# Altium PCB Board4layer.PcbDoc (part 2 of 2)
Units mm, origin at the board's own origin, x right, y up, seen from the top; angles counter-clockwise.
Board outline 136 x 96 mm, 4 copper layers (Top Layer, Int1 (GND), Int2 (PWR), Bottom Layer), stack 1.369 mm thick; 242 components, 241 nets, 1041 pads, 277 vias.
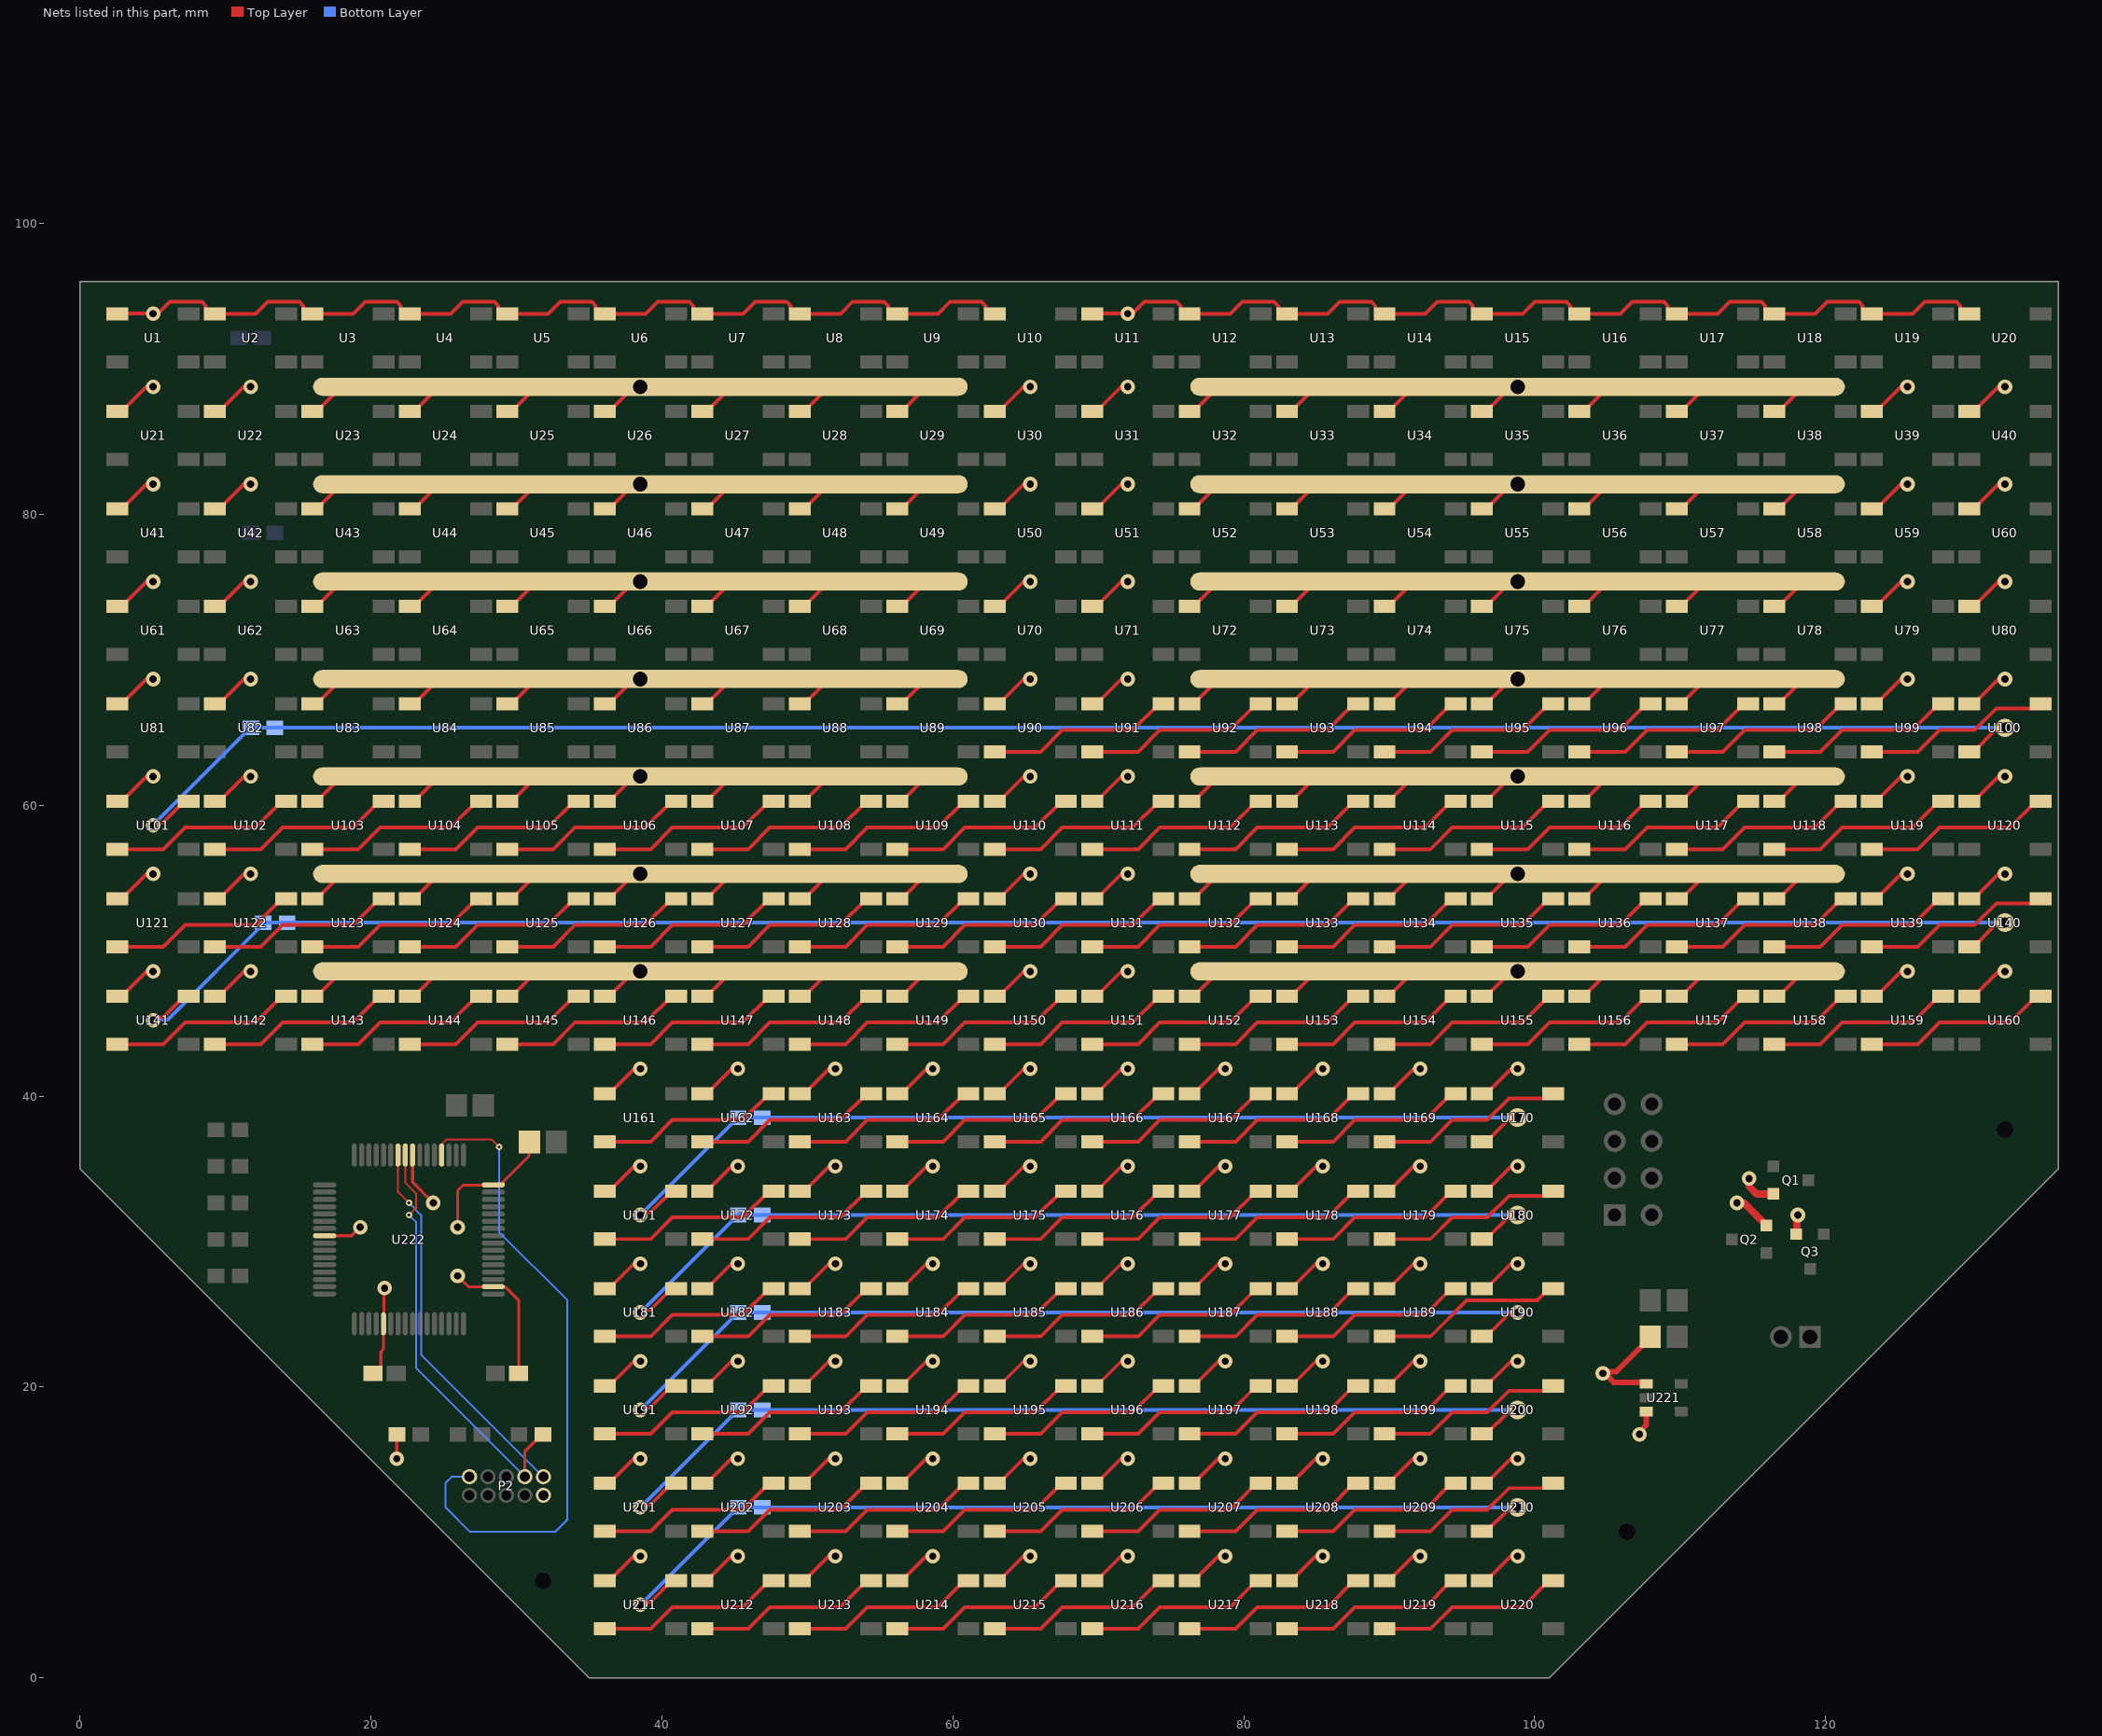
[diagram p4: the nets of this part, all layers, seen from the top]

## Via types
v1: diameter 1, hole 0.5, Top Layer to Bottom Layer, tented both sides, 221 vias
v2: diameter 1, hole 0.5, Top Layer to Bottom Layer, 33 vias
v3: diameter 1.27, hole 0.711, Top Layer to Bottom Layer, 8 vias
v4: diameter 0.45, hole 0.2, Top Layer to Bottom Layer, 7 vias
v5: diameter 1, hole 0.5, Top Layer to Bottom Layer, tented top, 5 vias
v6: diameter 0.45, hole 0.2, Top Layer to Bottom Layer, tented top, 3 vias

## Nets (pads, with @x,y where several pads share a name; then routed paths per layer and width w, separated by ;. In a path a pad name is that pad's centre, name@x,y a point inside that pad or via, vN(x,y) a via of type N, cw(c..) or ccw(c..) an arc to the next point about the centre after c; other vN are vias at no path point) (continued)
NetU90_2: U90.2 U91.4 | length 13
  Top Layer w0.254: U90.2@62.875,63.675 66.036,63.675 67.525,65.163 72.363,65.163 74.175,66.975 U91.4@74.475,66.975
NetU91_2: U91.2 U92.4 | length 13
  Top Layer w0.254: U91.2@69.575,63.675 72.736,63.675 74.225,65.163 79.064,65.163 80.875,66.975 U92.4@81.175,66.975
NetU92_2: U92.2 U93.4 | length 13
  Top Layer w0.254: U92.2@76.275,63.675 79.436,63.675 80.925,65.163 85.764,65.163 87.575,66.975 U93.4@87.875,66.975
NetU93_2: U93.2 U94.4 | length 13
  Top Layer w0.254: U93.2@82.975,63.675 86.136,63.675 87.625,65.163 92.464,65.163 94.275,66.975 U94.4@94.575,66.975
NetU94_2: U94.2 U95.4 | length 13
  Top Layer w0.254: U94.2@89.675,63.675 92.836,63.675 94.325,65.163 99.164,65.163 100.975,66.975 U95.4@101.275,66.975
NetU95_2: U95.2 U96.4 | length 13
  Top Layer w0.254: U95.2@96.375,63.675 99.536,63.675 101.025,65.163 105.863,65.163 107.675,66.975 U96.4@107.975,66.975
NetU96_2: U96.2 U97.4 | length 13
  Top Layer w0.254: U96.2@103.075,63.675 106.236,63.675 107.725,65.163 112.564,65.163 114.375,66.975 U97.4@114.675,66.975
NetU97_2: U97.2 U98.4 | length 13
  Top Layer w0.254: U97.2@109.775,63.675 112.936,63.675 114.425,65.163 119.264,65.163 121.075,66.975 U98.4@121.375,66.975
NetU98_2: U98.2 U99.4 | length 13
  Top Layer w0.254: U98.2@116.475,63.675 119.636,63.675 121.125,65.163 125.964,65.163 127.775,66.975 U99.4@128.075,66.975
NetU99_2: U99.2 U100.4 | length 13
  Top Layer w0.254: U99.2@123.175,63.675 126.336,63.675 127.825,65.163 130.244,65.163 131.733,66.652 134.452,66.652 U100.4@134.775,66.975
NetU100_2: pad.*@11.75,65.325 pad.*@13.4,65.325 U100.2 U101.4 | length 136.3
  Top Layer w0.254: v2(5.025,58.625) 5.219,58.819 5.719,58.819 7.175,60.275 U101.4@7.475,60.275 ; U100.2@129.875,63.675 130.175,63.675 131.631,65.131 132.131,65.131 v3(132.325,65.325)
  Bottom Layer w0.254: v2(5.025,58.625) 11.725,65.325 v3(132.325,65.325)
NetU101_2: U101.2 U102.4 | length 13
  Top Layer w0.254: U101.2@2.575,56.975 5.736,56.975 7.225,58.464 12.064,58.464 13.875,60.275 U102.4@14.175,60.275
NetU102_2: U102.2 U103.4 | length 13
  Top Layer w0.254: U102.2@9.275,56.975 12.436,56.975 13.925,58.464 18.763,58.464 20.575,60.275 U103.4@20.875,60.275
NetU103_2: U103.2 U104.4 | length 13
  Top Layer w0.254: U103.2@15.975,56.975 19.136,56.975 20.625,58.464 25.464,58.464 27.275,60.275 U104.4@27.575,60.275
NetU104_2: U104.2 U105.4 | length 13
  Top Layer w0.254: U104.2@22.675,56.975 25.836,56.975 27.325,58.464 32.164,58.464 33.975,60.275 U105.4@34.275,60.275
NetU105_2: U105.2 U106.4 | length 13
  Top Layer w0.254: U105.2@29.375,56.975 32.536,56.975 34.025,58.464 38.864,58.464 40.675,60.275 U106.4@40.975,60.275
NetU106_2: U106.2 U107.4 | length 13
  Top Layer w0.254: U106.2@36.075,56.975 39.236,56.975 40.725,58.464 45.564,58.464 47.375,60.275 U107.4@47.675,60.275
NetU107_2: U107.2 U108.4 | length 13
  Top Layer w0.254: U107.2@42.775,56.975 45.936,56.975 47.425,58.464 52.264,58.464 54.075,60.275 U108.4@54.375,60.275
NetU108_2: U108.2 U109.4 | length 13
  Top Layer w0.254: U108.2@49.475,56.975 52.636,56.975 54.125,58.464 58.964,58.464 60.775,60.275 U109.4@61.075,60.275
NetU109_2: U109.2 U110.4 | length 13
  Top Layer w0.254: U109.2@56.175,56.975 59.336,56.975 60.825,58.464 65.664,58.464 67.475,60.275 U110.4@67.775,60.275
NetU110_2: U110.2 U111.4 | length 13
  Top Layer w0.254: U110.2@62.875,56.975 66.036,56.975 67.525,58.464 72.363,58.464 74.175,60.275 U111.4@74.475,60.275
NetU111_2: U111.2 U112.4 | length 13
  Top Layer w0.254: U111.2@69.575,56.975 72.736,56.975 74.225,58.464 79.064,58.464 80.875,60.275 U112.4@81.175,60.275
NetU112_2: U112.2 U113.4 | length 13
  Top Layer w0.254: U112.2@76.275,56.975 79.436,56.975 80.925,58.464 85.764,58.464 87.575,60.275 U113.4@87.875,60.275
NetU113_2: U113.2 U114.4 | length 13
  Top Layer w0.254: U113.2@82.975,56.975 86.136,56.975 87.625,58.464 92.464,58.464 94.275,60.275 U114.4@94.575,60.275
NetU114_2: U114.2 U115.4 | length 13
  Top Layer w0.254: U114.2@89.675,56.975 92.836,56.975 94.325,58.464 99.164,58.464 100.975,60.275 U115.4@101.275,60.275
NetU115_2: U115.2 U116.4 | length 13
  Top Layer w0.254: U115.2@96.375,56.975 99.536,56.975 101.025,58.464 105.863,58.464 107.675,60.275 U116.4@107.975,60.275
NetU116_2: U116.2 U117.4 | length 13
  Top Layer w0.254: U116.2@103.075,56.975 106.236,56.975 107.725,58.464 112.564,58.464 114.375,60.275 U117.4@114.675,60.275
NetU117_2: U117.2 U118.4 | length 13
  Top Layer w0.254: U117.2@109.775,56.975 112.936,56.975 114.425,58.464 119.264,58.464 121.075,60.275 U118.4@121.375,60.275
NetU118_2: U118.2 U119.4 | length 13
  Top Layer w0.254: U118.2@116.475,56.975 119.636,56.975 121.125,58.464 125.964,58.464 127.775,60.275 U119.4@128.075,60.275
NetU119_2: U119.2 U120.4 | length 13
  Top Layer w0.254: U119.2@123.175,56.975 126.336,56.975 127.825,58.464 132.664,58.464 134.475,60.275 U120.4@134.775,60.275
NetU121_2: U121.2 U122.4 | length 13
  Top Layer w0.254: U121.2@2.575,50.275 5.736,50.275 7.225,51.763 12.064,51.763 13.875,53.575 U122.4@14.175,53.575
NetU122_2: U122.2 U123.4 | length 13
  Top Layer w0.254: U122.2@9.275,50.275 12.436,50.275 13.925,51.763 18.763,51.763 20.575,53.575 U123.4@20.875,53.575
NetU123_2: U123.2 U124.4 | length 13
  Top Layer w0.254: U123.2@15.975,50.275 19.136,50.275 20.625,51.763 25.464,51.763 27.275,53.575 U124.4@27.575,53.575
NetU124_2: U124.2 U125.4 | length 13
  Top Layer w0.254: U124.2@22.675,50.275 25.836,50.275 27.325,51.763 32.164,51.763 33.975,53.575 U125.4@34.275,53.575
NetU125_2: U125.2 U126.4 | length 13
  Top Layer w0.254: U125.2@29.375,50.275 32.536,50.275 34.025,51.763 38.864,51.763 40.675,53.575 U126.4@40.975,53.575
NetU126_2: U126.2 U127.4 | length 13
  Top Layer w0.254: U126.2@36.075,50.275 39.236,50.275 40.725,51.763 45.564,51.763 47.375,53.575 U127.4@47.675,53.575
NetU127_2: U127.2 U128.4 | length 13
  Top Layer w0.254: U127.2@42.775,50.275 45.936,50.275 47.425,51.763 52.264,51.763 54.075,53.575 U128.4@54.375,53.575
NetU128_2: U128.2 U129.4 | length 13
  Top Layer w0.254: U128.2@49.475,50.275 52.636,50.275 54.125,51.763 58.964,51.763 60.775,53.575 U129.4@61.075,53.575
NetU129_2: U129.2 U130.4 | length 13
  Top Layer w0.254: U129.2@56.175,50.275 59.336,50.275 60.825,51.763 65.664,51.763 67.475,53.575 U130.4@67.775,53.575
NetU130_2: U130.2 U131.4 | length 13
  Top Layer w0.254: U130.2@62.875,50.275 66.036,50.275 67.525,51.763 72.363,51.763 74.175,53.575 U131.4@74.475,53.575
NetU131_2: U131.2 U132.4 | length 13
  Top Layer w0.254: U131.2@69.575,50.275 72.736,50.275 74.225,51.763 79.064,51.763 80.875,53.575 U132.4@81.175,53.575
NetU132_2: U132.2 U133.4 | length 13
  Top Layer w0.254: U132.2@76.275,50.275 79.436,50.275 80.925,51.763 85.764,51.763 87.575,53.575 U133.4@87.875,53.575
NetU133_2: U133.2 U134.4 | length 13
  Top Layer w0.254: U133.2@82.975,50.275 86.136,50.275 87.625,51.763 92.464,51.763 94.275,53.575 U134.4@94.575,53.575
NetU134_2: U134.2 U135.4 | length 13
  Top Layer w0.254: U134.2@89.675,50.275 92.836,50.275 94.325,51.763 99.164,51.763 100.975,53.575 U135.4@101.275,53.575
NetU135_2: U135.2 U136.4 | length 13
  Top Layer w0.254: U135.2@96.375,50.275 99.536,50.275 101.025,51.763 105.863,51.763 107.675,53.575 U136.4@107.975,53.575
NetU136_2: U136.2 U137.4 | length 13
  Top Layer w0.254: U136.2@103.075,50.275 106.236,50.275 107.725,51.763 112.564,51.763 114.375,53.575 U137.4@114.675,53.575
NetU137_2: U137.2 U138.4 | length 13
  Top Layer w0.254: U137.2@109.775,50.275 112.936,50.275 114.425,51.763 119.264,51.763 121.075,53.575 U138.4@121.375,53.575
NetU138_2: U138.2 U139.4 | length 13
  Top Layer w0.254: U138.2@116.475,50.275 119.636,50.275 121.125,51.763 125.964,51.763 127.775,53.575 U139.4@128.075,53.575
NetU139_2: U139.2 U140.4 | length 13
  Top Layer w0.254: U139.2@123.175,50.275 126.336,50.275 127.825,51.763 130.244,51.763 131.733,53.252 134.452,53.252 U140.4@134.775,53.575
NetU140_2: pad.*@12.588,51.925 pad.*@14.238,51.925 U140.2 U141.4 | length 136.3
  Top Layer w0.254: v2(5.025,45.225) 5.219,45.419 5.719,45.419 7.175,46.875 U141.4@7.475,46.875 ; U140.2@129.875,50.275 130.175,50.275 131.631,51.731 132.131,51.731 v3(132.325,51.925)
  Bottom Layer w0.254: v2(5.025,45.225) 5.066,45.266 6.041,45.266 12.7,51.925 v3(132.325,51.925)
NetU141_2: U141.2 U142.4 | length 13
  Top Layer w0.254: U141.2@2.575,43.575 5.736,43.575 7.225,45.063 12.064,45.063 13.875,46.875 U142.4@14.175,46.875
NetU142_2: U142.2 U143.4 | length 13
  Top Layer w0.254: U142.2@9.275,43.575 12.436,43.575 13.925,45.063 18.763,45.063 20.575,46.875 U143.4@20.875,46.875
NetU143_2: U143.2 U144.4 | length 13
  Top Layer w0.254: U143.2@15.975,43.575 19.136,43.575 20.625,45.063 25.464,45.063 27.275,46.875 U144.4@27.575,46.875
NetU144_2: U144.2 U145.4 | length 13
  Top Layer w0.254: U144.2@22.675,43.575 25.836,43.575 27.325,45.063 32.164,45.063 33.975,46.875 U145.4@34.275,46.875
NetU145_2: U145.2 U146.4 | length 13
  Top Layer w0.254: U145.2@29.375,43.575 32.536,43.575 34.025,45.063 38.864,45.063 40.675,46.875 U146.4@40.975,46.875
NetU146_2: U146.2 U147.4 | length 13
  Top Layer w0.254: U146.2@36.075,43.575 39.236,43.575 40.725,45.063 45.564,45.063 47.375,46.875 U147.4@47.675,46.875
NetU147_2: U147.2 U148.4 | length 13
  Top Layer w0.254: U147.2@42.775,43.575 45.936,43.575 47.425,45.063 52.264,45.063 54.075,46.875 U148.4@54.375,46.875
NetU148_2: U148.2 U149.4 | length 13
  Top Layer w0.254: U148.2@49.475,43.575 52.636,43.575 54.125,45.063 58.964,45.063 60.775,46.875 U149.4@61.075,46.875
NetU149_2: U149.2 U150.4 | length 13
  Top Layer w0.254: U149.2@56.175,43.575 59.336,43.575 60.825,45.063 65.664,45.063 67.475,46.875 U150.4@67.775,46.875
NetU150_2: U150.2 U151.4 | length 13
  Top Layer w0.254: U150.2@62.875,43.575 66.036,43.575 67.525,45.063 72.363,45.063 74.175,46.875 U151.4@74.475,46.875
NetU151_2: U151.2 U152.4 | length 13
  Top Layer w0.254: U151.2@69.575,43.575 72.736,43.575 74.225,45.063 79.064,45.063 80.875,46.875 U152.4@81.175,46.875
NetU152_2: U152.2 U153.4 | length 13
  Top Layer w0.254: U152.2@76.275,43.575 79.436,43.575 80.925,45.063 85.764,45.063 87.575,46.875 U153.4@87.875,46.875
NetU153_2: U153.2 U154.4 | length 13
  Top Layer w0.254: U153.2@82.975,43.575 86.136,43.575 87.625,45.063 92.464,45.063 94.275,46.875 U154.4@94.575,46.875
NetU154_2: U154.2 U155.4 | length 13
  Top Layer w0.254: U154.2@89.675,43.575 92.836,43.575 94.325,45.063 99.164,45.063 100.975,46.875 U155.4@101.275,46.875
NetU155_2: U155.2 U156.4 | length 13
  Top Layer w0.254: U155.2@96.375,43.575 99.536,43.575 101.025,45.063 105.863,45.063 107.675,46.875 U156.4@107.975,46.875
NetU156_2: U156.2 U157.4 | length 13
  Top Layer w0.254: U156.2@103.075,43.575 106.236,43.575 107.725,45.063 112.564,45.063 114.375,46.875 U157.4@114.675,46.875
NetU157_2: U157.2 U158.4 | length 13
  Top Layer w0.254: U157.2@109.775,43.575 112.936,43.575 114.425,45.063 119.264,45.063 121.075,46.875 U158.4@121.375,46.875
NetU158_2: U158.2 U159.4 | length 13
  Top Layer w0.254: U158.2@116.475,43.575 119.636,43.575 121.125,45.063 125.964,45.063 127.775,46.875 U159.4@128.075,46.875
NetU159_2: U159.2 U160.4 | length 13
  Top Layer w0.254: U159.2@123.175,43.575 126.336,43.575 127.825,45.063 132.664,45.063 134.475,46.875 U160.4@134.775,46.875
NetU161_2: U161.2 U162.4 | length 13
  Top Layer w0.254: U161.2@36.075,36.875 39.236,36.875 40.725,38.363 45.564,38.363 47.375,40.175 U162.4@47.675,40.175
NetU162_2: U162.2 U163.4 | length 13
  Top Layer w0.254: U162.2@42.775,36.875 45.936,36.875 47.425,38.363 52.263,38.363 54.075,40.175 U163.4@54.375,40.175
NetU163_2: U163.2 U164.4 | length 13
  Top Layer w0.254: U163.2@49.475,36.875 52.636,36.875 54.125,38.363 58.963,38.363 60.775,40.175 U164.4@61.075,40.175
NetU164_2: U164.2 U165.4 | length 13
  Top Layer w0.254: U164.2@56.175,36.875 59.336,36.875 60.825,38.363 65.664,38.363 67.475,40.175 U165.4@67.775,40.175
NetU165_2: U165.2 U166.4 | length 13
  Top Layer w0.254: U165.2@62.875,36.875 66.036,36.875 67.525,38.363 72.364,38.363 74.175,40.175 U166.4@74.475,40.175
NetU166_2: U166.2 U167.4 | length 13
  Top Layer w0.254: U166.2@69.575,36.875 72.736,36.875 74.225,38.363 79.064,38.363 80.875,40.175 U167.4@81.175,40.175
NetU167_2: U167.2 U168.4 | length 13
  Top Layer w0.254: U167.2@76.275,36.875 79.436,36.875 80.925,38.363 85.763,38.363 87.575,40.175 U168.4@87.875,40.175
NetU168_2: U168.2 U169.4 | length 13
  Top Layer w0.254: U168.2@82.975,36.875 86.136,36.875 87.625,38.363 92.463,38.363 94.275,40.175 U169.4@94.575,40.175
NetU169_2: U169.2 U170.4 | length 13
  Top Layer w0.254: U169.2@89.675,36.875 92.836,36.875 94.325,38.363 96.744,38.363 98.233,39.852 100.952,39.852 U170.4@101.275,40.175
NetU170_2: pad.*@45.25,38.525 pad.*@46.9,38.525 U170.2 U171.4 | length 69.3
  Top Layer w0.254: v2(38.525,31.825) 38.719,32.019 39.219,32.019 40.675,33.475 U171.4@40.975,33.475 ; U170.2@96.375,36.875 96.675,36.875 98.131,38.331 98.631,38.331 v3(98.825,38.525)
  Bottom Layer w0.254: v2(38.525,31.825) 45.225,38.525 v3(98.825,38.525)
NetU171_2: U171.2 U172.4 | length 13
  Top Layer w0.254: U171.2@36.075,30.175 39.236,30.175 40.725,31.664 45.564,31.664 47.375,33.475 U172.4@47.675,33.475
NetU172_2: U172.2 U173.4 | length 13
  Top Layer w0.254: U172.2@42.775,30.175 45.936,30.175 47.425,31.664 52.264,31.664 54.075,33.475 U173.4@54.375,33.475
NetU173_2: U173.2 U174.4 | length 13
  Top Layer w0.254: U173.2@49.475,30.175 52.636,30.175 54.125,31.664 58.964,31.664 60.775,33.475 U174.4@61.075,33.475
NetU174_2: U174.2 U175.4 | length 13
  Top Layer w0.254: U174.2@56.175,30.175 59.336,30.175 60.825,31.664 65.664,31.664 67.475,33.475 U175.4@67.775,33.475
NetU175_2: U175.2 U176.4 | length 13
  Top Layer w0.254: U175.2@62.875,30.175 66.036,30.175 67.525,31.664 72.364,31.664 74.175,33.475 U176.4@74.475,33.475
NetU176_2: U176.2 U177.4 | length 13
  Top Layer w0.254: U176.2@69.575,30.175 72.736,30.175 74.225,31.664 79.064,31.664 80.875,33.475 U177.4@81.175,33.475
NetU177_2: U177.2 U178.4 | length 13
  Top Layer w0.254: U177.2@76.275,30.175 79.436,30.175 80.925,31.664 85.764,31.664 87.575,33.475 U178.4@87.875,33.475
NetU178_2: U178.2 U179.4 | length 13
  Top Layer w0.254: U178.2@82.975,30.175 86.136,30.175 87.625,31.664 92.464,31.664 94.275,33.475 U179.4@94.575,33.475
NetU179_2: U179.2 U180.4 | length 13
  Top Layer w0.254: U179.2@89.675,30.175 92.836,30.175 94.325,31.664 96.744,31.664 98.233,33.152 100.952,33.152 U180.4@101.275,33.475
NetU180_2: pad.*@45.25,31.825 pad.*@46.9,31.825 U180.2 U181.4 | length 69.3
  Top Layer w0.254: v2(38.525,25.125) 38.719,25.319 39.219,25.319 40.675,26.775 U181.4@40.975,26.775 ; U180.2@96.375,30.175 96.675,30.175 98.131,31.631 98.631,31.631 v3(98.825,31.825)
  Bottom Layer w0.254: v2(38.525,25.125) 45.225,31.825 v3(98.825,31.825)
NetU181_2: U181.2 U182.4 | length 13
  Top Layer w0.254: U181.2@36.075,23.475 39.236,23.475 40.725,24.963 45.564,24.963 47.375,26.775 U182.4@47.675,26.775
NetU182_2: U182.2 U183.4 | length 13
  Top Layer w0.254: U182.2@42.775,23.475 45.936,23.475 47.425,24.963 52.263,24.963 54.075,26.775 U183.4@54.375,26.775
NetU183_2: U183.2 U184.4 | length 13
  Top Layer w0.254: U183.2@49.475,23.475 52.636,23.475 54.125,24.963 58.963,24.963 60.775,26.775 U184.4@61.075,26.775
NetU184_2: U184.2 U185.4 | length 13
  Top Layer w0.254: U184.2@56.175,23.475 59.336,23.475 60.825,24.963 65.664,24.963 67.475,26.775 U185.4@67.775,26.775
NetU185_2: U185.2 U186.4 | length 13
  Top Layer w0.254: U185.2@62.875,23.475 66.036,23.475 67.525,24.963 72.364,24.963 74.175,26.775 U186.4@74.475,26.775
NetU186_2: U186.2 U187.4 | length 13
  Top Layer w0.254: U186.2@69.575,23.475 72.736,23.475 74.225,24.963 79.064,24.963 80.875,26.775 U187.4@81.175,26.775
NetU187_2: U187.2 U188.4 | length 13
  Top Layer w0.254: U187.2@76.275,23.475 79.436,23.475 80.925,24.963 85.763,24.963 87.575,26.775 U188.4@87.875,26.775
NetU188_2: U188.2 U189.4 | length 13
  Top Layer w0.254: U188.2@82.975,23.475 86.136,23.475 87.625,24.963 92.463,24.963 94.275,26.775 U189.4@94.575,26.775
NetU189_2: U189.2 U190.4 | length 13
  Top Layer w0.254: U189.2@89.675,23.475 92.836,23.475 95.316,25.955 100.155,25.955 100.975,26.775 U190.4@101.275,26.775
NetU190_2: pad.*@45.25,25.125 pad.*@46.9,25.125 U190.2 U191.4 | length 69.3
  Top Layer w0.254: v2(38.525,18.425) 38.668,18.568 39.168,18.568 40.675,20.075 U191.4@40.975,20.075 ; U190.2@96.375,23.475 96.675,23.475 98.182,24.982 98.682,24.982 v2(98.825,25.125)
  Bottom Layer w0.254: v2(38.525,18.425) 45.225,25.125 v2(98.825,25.125)
NetU191_2: U191.2 U192.4 | length 13
  Top Layer w0.254: U191.2@36.075,16.775 39.236,16.775 40.725,18.263 45.564,18.263 47.375,20.075 U192.4@47.675,20.075
NetU192_2: U192.2 U193.4 | length 13
  Top Layer w0.254: U192.2@42.775,16.775 45.936,16.775 47.425,18.263 52.263,18.263 54.075,20.075 U193.4@54.375,20.075
NetU193_2: U193.2 U194.4 | length 13
  Top Layer w0.254: U193.2@49.475,16.775 52.636,16.775 54.125,18.263 58.963,18.263 60.775,20.075 U194.4@61.075,20.075
NetU194_2: U194.2 U195.4 | length 13
  Top Layer w0.254: U194.2@56.175,16.775 59.336,16.775 60.825,18.263 65.664,18.263 67.475,20.075 U195.4@67.775,20.075
NetU195_2: U195.2 U196.4 | length 13
  Top Layer w0.254: U195.2@62.875,16.775 66.036,16.775 67.525,18.263 72.364,18.263 74.175,20.075 U196.4@74.475,20.075
NetU196_2: U196.2 U197.4 | length 13
  Top Layer w0.254: U196.2@69.575,16.775 72.736,16.775 74.225,18.263 79.064,18.263 80.875,20.075 U197.4@81.175,20.075
NetU197_2: U197.2 U198.4 | length 13
  Top Layer w0.254: U197.2@76.275,16.775 79.436,16.775 80.925,18.263 85.763,18.263 87.575,20.075 U198.4@87.875,20.075
NetU198_2: U198.2 U199.4 | length 13
  Top Layer w0.254: U198.2@82.975,16.775 86.136,16.775 87.625,18.263 92.463,18.263 94.275,20.075 U199.4@94.575,20.075
NetU199_2: U199.2 U200.4 | length 13
  Top Layer w0.254: U199.2@89.675,16.775 92.836,16.775 94.325,18.263 96.744,18.263 98.233,19.752 100.952,19.752 U200.4@101.275,20.075
NetU200_2: pad.*@45.25,18.425 pad.*@46.9,18.425 U200.2 U201.4 | length 69.3
  Top Layer w0.254: v2(38.525,11.725) 38.719,11.919 39.219,11.919 40.675,13.375 U201.4@40.975,13.375 ; U200.2@96.375,16.775 96.675,16.775 98.131,18.231 98.631,18.231 v3(98.825,18.425)
  Bottom Layer w0.254: v2(38.525,11.725) 45.225,18.425 v3(98.825,18.425)
NetU201_2: U201.2 U202.4 | length 13
  Top Layer w0.254: U201.2@36.075,10.075 39.236,10.075 40.725,11.563 45.564,11.563 47.375,13.375 U202.4@47.675,13.375
NetU202_2: U202.2 U203.4 | length 13
  Top Layer w0.254: U202.2@42.775,10.075 45.936,10.075 47.425,11.563 52.263,11.563 54.075,13.375 U203.4@54.375,13.375
NetU203_2: U203.2 U204.4 | length 13
  Top Layer w0.254: U203.2@49.475,10.075 52.636,10.075 54.125,11.563 58.963,11.563 60.775,13.375 U204.4@61.075,13.375
NetU204_2: U204.2 U205.4 | length 13
  Top Layer w0.254: U204.2@56.175,10.075 59.336,10.075 60.825,11.563 65.664,11.563 67.475,13.375 U205.4@67.775,13.375
NetU205_2: U205.2 U206.4 | length 13
  Top Layer w0.254: U205.2@62.875,10.075 66.036,10.075 67.525,11.563 72.364,11.563 74.175,13.375 U206.4@74.475,13.375
NetU206_2: U206.2 U207.4 | length 13
  Top Layer w0.254: U206.2@69.575,10.075 72.736,10.075 74.225,11.563 79.064,11.563 80.875,13.375 U207.4@81.175,13.375
NetU207_2: U207.2 U208.4 | length 13
  Top Layer w0.254: U207.2@76.275,10.075 79.436,10.075 80.925,11.563 85.763,11.563 87.575,13.375 U208.4@87.875,13.375
NetU208_2: U208.2 U209.4 | length 13
  Top Layer w0.254: U208.2@82.975,10.075 86.136,10.075 87.625,11.563 92.463,11.563 94.275,13.375 U209.4@94.575,13.375
NetU209_2: U209.2 U210.4 | length 13
  Top Layer w0.254: U209.2@89.675,10.075 92.836,10.075 94.325,11.563 96.744,11.563 98.233,13.052 100.952,13.052 U210.4@101.275,13.375
NetU210_2: pad.*@45.25,11.725 pad.*@46.9,11.725 U210.2 U211.4 | length 69.3
  Top Layer w0.254: v2(38.525,5.025) 38.719,5.219 39.219,5.219 40.675,6.675 U211.4@40.975,6.675 ; U210.2@96.375,10.075 96.675,10.075 98.131,11.531 98.631,11.531 v3(98.825,11.725)
  Bottom Layer w0.254: v2(38.525,5.025) 45.225,11.725 v3(98.825,11.725)
NetU211_2: U211.2 U212.4 | length 13
  Top Layer w0.254: U211.2@36.075,3.375 39.236,3.375 40.725,4.864 45.564,4.864 47.375,6.675 U212.4@47.675,6.675
NetU212_2: U212.2 U213.4 | length 13
  Top Layer w0.254: U212.2@42.775,3.375 45.936,3.375 47.425,4.864 52.263,4.864 54.075,6.675 U213.4@54.375,6.675
NetU213_2: U213.2 U214.4 | length 13
  Top Layer w0.254: U213.2@49.475,3.375 52.636,3.375 54.125,4.864 58.963,4.864 60.775,6.675 U214.4@61.075,6.675
NetU214_2: U214.2 U215.4 | length 13
  Top Layer w0.254: U214.2@56.175,3.375 59.336,3.375 60.825,4.864 65.664,4.864 67.475,6.675 U215.4@67.775,6.675
NetU215_2: U215.2 U216.4 | length 13
  Top Layer w0.254: U215.2@62.875,3.375 66.036,3.375 67.525,4.864 72.364,4.864 74.175,6.675 U216.4@74.475,6.675
NetU216_2: U216.2 U217.4 | length 13
  Top Layer w0.254: U216.2@69.575,3.375 72.736,3.375 74.225,4.864 79.064,4.864 80.875,6.675 U217.4@81.175,6.675
NetU217_2: U217.2 U218.4 | length 13
  Top Layer w0.254: U217.2@76.275,3.375 79.436,3.375 80.925,4.864 85.763,4.864 87.575,6.675 U218.4@87.875,6.675
NetU218_2: U218.2 U219.4 | length 13
  Top Layer w0.254: U218.2@82.975,3.375 86.136,3.375 87.625,4.864 92.463,4.864 94.275,6.675 U219.4@94.575,6.675
NetU219_2: U219.2 U220.4 | length 13
  Top Layer w0.254: U219.2@89.675,3.375 92.836,3.375 94.325,4.864 99.164,4.864 100.975,6.675 U220.4@101.275,6.675
RESETN: P2.10 U222.52 | length 45.5
  Top Layer w0.127: U222.52@24.862,35.95 24.905,35.993 24.905,36.742 25.18,37.017 28.308,37.017 v6(28.81,36.515)
  Bottom Layer w0.127: P2.10@26.772,13.832 25.557,13.832 25.125,13.4 25.125,11.725 26.8,10.05 32.663,10.05 33.5,10.887 33.5,25.963 28.81,30.652 v6(28.81,36.515)
SWCLK: P2.4 R8.2 U222.57 | length 29.4
  Top Layer w0.1: R8.2@31.75,16.75 R8.2@31.825,16.75
  Top Layer w0.127: U222.57@22.362,35.95 22.362,34.069 23.104,33.327 23.104,32.317 v6(22.612,31.825)
  Top Layer w0.2: P2.4@30.582,13.832 30.583,15.582 R8.2@31.75,16.75
  Bottom Layer w0.127: v6(22.612,31.825) 23.12,31.318 23.12,21.295 P2.4@30.582,13.832
SWDIO: P2.2 U222.58 | length 26.3
  Top Layer w0.127: U222.58@21.862,35.95 21.862,33.413 v6(22.612,32.663)
  Bottom Layer w0.127: v6(22.612,32.663) 23.45,31.825 23.45,22.235 P2.2@31.852,13.832
VCC: C1.1 C3.1 C4.1 C5.1 P2.1 pad.*@38.525,48.575 pad.*@38.525,55.275 pad.*@38.525,61.975 pad.*@38.525,68.675 pad.*@38.525,75.375 pad.*@38.525,82.075 pad.*@38.525,88.775 pad.*@98.825,48.575 pad.*@98.825,55.275 pad.*@98.825,61.975 pad.*@98.825,68.675 pad.*@98.825,75.375 pad.*@98.825,82.075 pad.*@98.825,88.775 Q1.2 Q2.2 Q3.2 R6.1 U1.1 U2.1 U3.1 U4.1 U5.1 U6.1 U7.1 U8.1 U9.1 U10.1 U11.1 U12.1 U13.1 U14.1 U15.1 U16.1 U17.1 U18.1 U19.1 U20.1 U21.1 U22.1 U23.1 U24.1 U25.1 U26.1 U27.1 U28.1 U29.1 U30.1 U31.1 U32.1 U33.1 U34.1 U35.1 U36.1 U37.1 U38.1 U39.1 U40.1 U41.1 U42.1 U43.1 U44.1 U45.1 U46.1 U47.1 U48.1 U49.1 U50.1 U51.1 U52.1 U53.1 U54.1 U55.1 U56.1 U57.1 U58.1 U59.1 U60.1 U61.1 U62.1 U63.1 U64.1 U65.1 U66.1 U67.1 U68.1 U69.1 U70.1 U71.1 U72.1 U73.1 U74.1 U75.1 U76.1 U77.1 U78.1 U79.1 U80.1 U81.1 U82.1 U83.1 U84.1 U85.1 U86.1 U87.1 U88.1 U89.1 U90.1 U91.1 U92.1 U93.1 U94.1 U95.1 U96.1 U97.1 U98.1 U99.1 U100.1 U101.1 U102.1 U103.1 U104.1 U105.1 U106.1 U107.1 U108.1 U109.1 U110.1 U111.1 U112.1 U113.1 U114.1 U115.1 U116.1 U117.1 U118.1 U119.1 U120.1 U121.1 U122.1 U123.1 U124.1 U125.1 U126.1 U127.1 U128.1 U129.1 U130.1 U131.1 U132.1 U133.1 U134.1 U135.1 U136.1 U137.1 U138.1 U139.1 U140.1 U141.1 U142.1 U143.1 U144.1 U145.1 U146.1 U147.1 U148.1 U149.1 U150.1 U151.1 U152.1 U153.1 U154.1 U155.1 U156.1 U157.1 U158.1 U159.1 U160.1 U161.1 U162.1 U163.1 U164.1 U165.1 U166.1 U167.1 U168.1 U169.1 U170.1 U171.1 U172.1 U173.1 U174.1 U175.1 U176.1 U177.1 U178.1 U179.1 U180.1 U181.1 U182.1 U183.1 U184.1 U185.1 U186.1 U187.1 U188.1 U189.1 U190.1 U191.1 U192.1 U193.1 U194.1 U195.1 U196.1 U197.1 U198.1 U199.1 U200.1 U201.1 U202.1 U203.1 U204.1 U205.1 U206.1 U207.1 U208.1 U209.1 U210.1 U211.1 U212.1 U213.1 U214.1 U215.1 U216.1 U217.1 U218.1 U219.1 U220.1 U221.1 U221.3 U222.8 U222.21 U222.34 U222.48 U222.56 | length 817.7
  Top Layer w0.2: U222.8@16.812,30.4 18.675,30.4 v5(19.262,30.987) ; C5.1@20.137,20.937 20.262,20.937 20.687,21.362 20.687,22.422 20.862,22.597 U222.21@20.862,24.35 20.884,24.372 20.884,26.747 v5(20.937,26.8) ; U222.56@22.862,35.95 22.862,34.088 v5(24.288,32.663) ; v5(25.963,27.638) 26.7,26.9 U222.34@28.412,26.9 28.434,26.878 29.236,26.878 30.15,25.964 C4.1@30.15,20.937 C4.1@30.275,20.937 ; v5(25.963,30.987) 25.963,33.5 26.341,33.878 28.391,33.878 U222.48@28.412,33.9 28.997,33.9 29.066,33.969 29.066,34.091 30.867,35.892 30.867,36.817 C3.1@30.9,36.85
  Top Layer w0.254: U141.1@2.575,46.875 2.875,46.875 4.575,48.575 v2(5.025,48.575) ; U121.1@2.575,53.575 2.875,53.575 4.575,55.275 v1(5.025,55.275) ; U101.1@2.575,60.275 2.875,60.275 4.575,61.975 v1(5.025,61.975) ; U81.1@2.575,66.975 2.875,66.975 4.575,68.675 v1(5.025,68.675) ; U61.1@2.575,73.675 2.875,73.675 4.575,75.375 v1(5.025,75.375) ; U41.1@2.575,80.375 2.875,80.375 4.575,82.075 v1(5.025,82.075) ; U21.1@2.575,87.075 2.875,87.075 4.575,88.775 v1(5.025,88.775) ; U1.1@2.875,93.775 U1.1@2.575,93.775 2.6,93.8 v1(5.025,93.8) 5.366,93.8 6.172,94.606 8.383,94.606 8.652,94.337 8.652,94.098 8.975,93.775 U2.1@9.275,93.775 12.075,93.775 12.906,94.606 15.083,94.606 15.352,94.337 15.352,94.098 15.675,93.775 U3.1@15.975,93.775 18.775,93.775 19.606,94.606 21.783,94.606 22.052,94.337 22.052,94.098 22.375,93.775 U4.1@22.675,93.775 25.475,93.775 26.306,94.606 28.483,94.606 28.752,94.337 28.752,94.098 29.075,93.775 U5.1@29.375,93.775 32.175,93.775 33.006,94.606 35.183,94.606 35.452,94.337 35.452,94.098 35.775,93.775 U6.1@36.075,93.775 38.875,93.775 39.706,94.606 41.883,94.606 42.152,94.337 42.152,94.098 42.475,93.775 U7.1@42.775,93.775 45.575,93.775 46.406,94.606 48.583,94.606 48.852,94.337 48.852,94.098 49.175,93.775 U8.1@49.475,93.775 52.275,93.775 53.106,94.606 55.283,94.606 55.552,94.337 55.552,94.098 55.875,93.775 U9.1@56.175,93.775 58.975,93.775 59.806,94.606 61.983,94.606 62.252,94.337 62.252,94.098 62.575,93.775 U10.1@63.175,93.775 ; U142.1@9.275,46.875 9.575,46.875 11.275,48.575 v1(11.725,48.575) ; U122.1@9.275,53.575 9.575,53.575 11.275,55.275 v1(11.725,55.275) ; U102.1@9.275,60.275 9.575,60.275 11.275,61.975 v1(11.725,61.975) ; U82.1@9.275,66.975 9.575,66.975 11.275,68.675 v1(11.725,68.675) ; U62.1@9.275,73.675 9.575,73.675 11.275,75.375 v1(11.725,75.375) ; U42.1@9.275,80.375 9.575,80.375 11.275,82.075 v1(11.725,82.075) ; U22.1@9.275,87.075 9.575,87.075 11.275,88.775 v1(11.725,88.775) ; U143.1@15.975,46.875 16.275,46.875 17.975,48.575 pad.*@18.425,48.575 ; U123.1@15.975,53.575 16.275,53.575 17.975,55.275 pad.*@18.425,55.275 ; U103.1@15.975,60.275 16.275,60.275 17.975,61.975 pad.*@18.425,61.975 ; U83.1@15.975,66.975 16.275,66.975 17.975,68.675 pad.*@18.425,68.675 ; U63.1@15.975,73.675 16.275,73.675 17.975,75.375 pad.*@18.425,75.375 ; U43.1@15.975,80.375 16.275,80.375 17.975,82.075 pad.*@18.425,82.075 ; U23.1@15.975,87.075 16.275,87.075 17.975,88.775 pad.*@18.425,88.775 ; v5(19.262,30.987) v5@19.464,30.987 ; C5.1@19.739,20.539 C5.1@20.137,20.937 ; v2(21.775,15.075) 21.775,16.738 R6.1@21.788,16.75 R6.1@21.775,16.762 ; U144.1@22.675,46.875 22.975,46.875 24.675,48.575 pad.*@25.125,48.575 ; U124.1@22.675,53.575 22.975,53.575 24.675,55.275 pad.*@25.125,55.275 ; U104.1@22.675,60.275 22.975,60.275 24.675,61.975 pad.*@25.125,61.975 ; U84.1@22.675,66.975 22.975,66.975 24.675,68.675 pad.*@25.125,68.675 ; U64.1@22.675,73.675 22.975,73.675 24.675,75.375 pad.*@25.125,75.375 ; U44.1@22.675,80.375 22.975,80.375 24.675,82.075 pad.*@25.125,82.075 ; U24.1@22.675,87.075 22.975,87.075 24.675,88.775 pad.*@25.125,88.775 ; U145.1@29.375,46.875 29.675,46.875 31.375,48.575 pad.*@31.825,48.575 ; U125.1@29.375,53.575 29.675,53.575 31.375,55.275 pad.*@31.825,55.275 ; U105.1@29.375,60.275 29.675,60.275 31.375,61.975 pad.*@31.825,61.975 ; U85.1@29.375,66.975 29.675,66.975 31.375,68.675 pad.*@31.825,68.675 ; U65.1@29.375,73.675 29.675,73.675 31.375,75.375 pad.*@31.825,75.375 ; U45.1@29.375,80.375 29.675,80.375 31.375,82.075 pad.*@31.825,82.075 ; U25.1@29.375,87.075 29.675,87.075 31.375,88.775 pad.*@31.825,88.775 ; U211.1@36.075,6.675 36.375,6.675 38.075,8.375 v1(38.525,8.375) ; U201.1@36.075,13.375 36.375,13.375 38.075,15.075 v1(38.525,15.075) ; U191.1@36.075,20.075 36.375,20.075 38.075,21.775 v1(38.525,21.775) ; U181.1@36.075,26.775 36.375,26.775 38.075,28.475 v1(38.525,28.475) ; U161.1@36.075,40.175 36.375,40.175 38.075,41.875 v1(38.525,41.875) ; U171.1@36.075,33.475 36.375,33.475 38.075,35.175 v1(38.525,35.175) ; U146.1@36.075,46.875 36.375,46.875 38.075,48.575 pad.*@38.525,48.575 ; U126.1@36.075,53.575 36.375,53.575 38.075,55.275 pad.*@38.525,55.275 ; U106.1@36.075,60.275 36.375,60.275 38.075,61.975 pad.*@38.525,61.975 ; U86.1@36.075,66.975 36.375,66.975 38.075,68.675 pad.*@38.525,68.675 ; U66.1@36.075,73.675 36.375,73.675 38.075,75.375 pad.*@38.525,75.375 ; U46.1@36.075,80.375 36.375,80.375 38.075,82.075 pad.*@38.525,82.075 ; U26.1@36.075,87.075 36.375,87.075 38.075,88.775 pad.*@38.525,88.775 ; U212.1@42.775,6.675 43.075,6.675 44.775,8.375 v1(45.225,8.375) ; U202.1@42.775,13.375 43.075,13.375 44.775,15.075 v1(45.225,15.075) ; U192.1@42.775,20.075 43.075,20.075 44.775,21.775 v1(45.225,21.775) ; U182.1@42.775,26.775 43.075,26.775 44.775,28.475 v1(45.225,28.475) ; U172.1@42.775,33.475 43.075,33.475 44.775,35.175 v1(45.225,35.175) ; U162.1@42.775,40.175 43.075,40.175 44.775,41.875 v1(45.225,41.875) ; U147.1@42.775,46.875 43.075,46.875 44.775,48.575 pad.*@45.225,48.575 ; U127.1@42.775,53.575 43.075,53.575 44.775,55.275 pad.*@45.225,55.275 ; U107.1@42.775,60.275 43.075,60.275 44.775,61.975 pad.*@45.225,61.975 ; U87.1@42.775,66.975 43.075,66.975 44.775,68.675 pad.*@45.225,68.675 ; U67.1@42.775,73.675 43.075,73.675 44.775,75.375 pad.*@45.225,75.375 ; U47.1@42.775,80.375 43.075,80.375 44.775,82.075 pad.*@45.225,82.075 ; U27.1@42.775,87.075 43.075,87.075 44.775,88.775 pad.*@45.225,88.775 ; U213.1@49.475,6.675 49.775,6.675 51.475,8.375 v1(51.925,8.375) ; U203.1@49.475,13.375 49.775,13.375 51.475,15.075 v1(51.925,15.075) ; U193.1@49.475,20.075 49.775,20.075 51.475,21.775 v1(51.925,21.775) ; U183.1@49.475,26.775 49.775,26.775 51.475,28.475 v1(51.925,28.475) ; U173.1@49.475,33.475 49.775,33.475 51.475,35.175 v1(51.925,35.175) ; U163.1@49.475,40.175 49.775,40.175 51.475,41.875 v1(51.925,41.875) ; U148.1@49.475,46.875 49.775,46.875 51.475,48.575 pad.*@51.925,48.575 ; U128.1@49.475,53.575 49.775,53.575 51.475,55.275 pad.*@51.925,55.275 ; U108.1@49.475,60.275 49.775,60.275 51.475,61.975 pad.*@51.925,61.975 ; U88.1@49.475,66.975 49.775,66.975 51.475,68.675 pad.*@51.925,68.675 ; U68.1@49.475,73.675 49.775,73.675 51.475,75.375 pad.*@51.925,75.375 ; U48.1@49.475,80.375 49.775,80.375 51.475,82.075 pad.*@51.925,82.075 ; U28.1@49.475,87.075 49.775,87.075 51.475,88.775 pad.*@51.925,88.775 ; U214.1@56.175,6.675 56.475,6.675 58.175,8.375 v1(58.625,8.375) ; U204.1@56.175,13.375 56.475,13.375 58.175,15.075 v1(58.625,15.075) ; U194.1@56.175,20.075 56.475,20.075 58.175,21.775 v1(58.625,21.775) ; U184.1@56.175,26.775 56.475,26.775 58.175,28.475 v1(58.625,28.475) ; U174.1@56.175,33.475 56.475,33.475 58.175,35.175 v1(58.625,35.175) ; U164.1@56.175,40.175 56.475,40.175 58.175,41.875 v1(58.625,41.875) ; U149.1@56.175,46.875 56.475,46.875 58.175,48.575 pad.*@58.625,48.575 ; U129.1@56.175,53.575 56.475,53.575 58.175,55.275 pad.*@58.625,55.275 ; U109.1@56.175,60.275 56.475,60.275 58.175,61.975 pad.*@58.625,61.975 ; U89.1@56.175,66.975 56.475,66.975 58.175,68.675 pad.*@58.625,68.675 ; U69.1@56.175,73.675 56.475,73.675 58.175,75.375 pad.*@58.625,75.375 ; U49.1@56.175,80.375 56.475,80.375 58.175,82.075 pad.*@58.625,82.075 ; U29.1@56.175,87.075 56.475,87.075 58.175,88.775 pad.*@58.625,88.775 ; U215.1@62.875,6.675 63.175,6.675 64.875,8.375 v1@65.325,8.375 ; U205.1@62.875,13.375 63.175,13.375 64.875,15.075 v1@65.325,15.075 ; U195.1@62.875,20.075 63.175,20.075 64.875,21.775 v1@65.325,21.775 ; U185.1@62.875,26.775 63.175,26.775 64.875,28.475 v1@65.325,28.475 ; U175.1@62.875,33.475 63.175,33.475 64.875,35.175 v1(65.325,35.175) ; U165.1@62.875,40.175 63.175,40.175 64.875,41.875 v1@65.325,41.875 ; U150.1@62.875,46.875 63.175,46.875 64.875,48.575 v1(65.325,48.575) ; U130.1@62.875,53.575 63.175,53.575 64.875,55.275 v1(65.325,55.275) ; U110.1@62.875,60.275 63.175,60.275 64.875,61.975 v1(65.325,61.975) ; U90.1@62.875,66.975 63.175,66.975 64.875,68.675 v1(65.325,68.675) ; U70.1@62.875,73.675 63.175,73.675 64.875,75.375 v1(65.325,75.375) ; U50.1@62.875,80.375 63.175,80.375 64.875,82.075 v1(65.325,82.075) ; U30.1@62.875,87.075 63.175,87.075 64.875,88.775 v1(65.325,88.775) ; U216.1@69.575,6.675 69.875,6.675 71.575,8.375 v1(72.025,8.375) ; U206.1@69.575,13.375 69.875,13.375 71.575,15.075 v1(72.025,15.075) ; U196.1@69.575,20.075 69.875,20.075 71.575,21.775 v1(72.025,21.775) ; U186.1@69.575,26.775 69.875,26.775 71.575,28.475 v1(72.025,28.475) ; U176.1@69.575,33.475 69.875,33.475 71.575,35.175 v1(72.025,35.175) ; U166.1@69.575,40.175 69.875,40.175 71.575,41.875 v1(72.025,41.875) ; U151.1@69.575,46.875 69.875,46.875 71.575,48.575 v1(72.025,48.575) ; U131.1@69.575,53.575 69.875,53.575 71.575,55.275 v1(72.025,55.275) ; U111.1@69.575,60.275 69.875,60.275 71.575,61.975 v1(72.025,61.975) ; U91.1@69.575,66.975 69.875,66.975 71.575,68.675 v1(72.025,68.675) ; U71.1@69.575,73.675 69.875,73.675 71.575,75.375 v1(72.025,75.375) ; U51.1@69.575,80.375 69.875,80.375 71.575,82.075 v1(72.025,82.075) ; U31.1@69.575,87.075 69.875,87.075 71.575,88.775 v1(72.025,88.775) ; U11.1@69.575,93.775 69.6,93.8 v1(72.025,93.8) 72.366,93.8 73.172,94.606 75.383,94.606 75.652,94.337 75.652,94.098 75.975,93.775 U12.1@76.275,93.775 79.075,93.775 79.906,94.606 82.083,94.606 82.352,94.337 82.352,94.098 82.675,93.775 U13.1@82.975,93.775 85.775,93.775 86.606,94.606 88.783,94.606 89.052,94.337 89.052,94.098 89.375,93.775 U14.1@89.675,93.775 92.475,93.775 93.306,94.606 95.483,94.606 95.752,94.337 95.752,94.098 96.075,93.775 U15.1@96.375,93.775 99.175,93.775 100.006,94.606 102.183,94.606 102.452,94.337 102.452,94.098 102.775,93.775 U16.1@103.075,93.775 105.875,93.775 106.706,94.606 108.883,94.606 109.152,94.337 109.152,94.098 109.475,93.775 109.775,93.775 112.575,93.775 113.406,94.606 115.583,94.606 115.852,94.337 115.852,94.098 116.175,93.775 U18.1@116.475,93.775 119.275,93.775 120.106,94.606 122.283,94.606 122.552,94.337 122.552,94.098 122.875,93.775 U19.1@123.175,93.775 125.975,93.775 126.806,94.606 128.983,94.606 129.252,94.337 129.252,94.098 129.575,93.775 U20.1@130.175,93.775 ; U217.1@76.275,6.675 76.575,6.675 78.275,8.375 v1(78.725,8.375) ; U207.1@76.275,13.375 76.575,13.375 78.275,15.075 v1(78.725,15.075) ; U197.1@76.275,20.075 76.575,20.075 78.275,21.775 v1(78.725,21.775) ; U187.1@76.275,26.775 76.575,26.775 78.275,28.475 v1(78.725,28.475) ; U177.1@76.275,33.475 76.575,33.475 78.275,35.175 v1(78.725,35.175) ; U167.1@76.275,40.175 76.575,40.175 78.275,41.875 v1(78.725,41.875) ; U152.1@76.275,46.875 76.575,46.875 78.275,48.575 pad.*@78.725,48.575 ; U132.1@76.275,53.575 76.575,53.575 78.275,55.275 pad.*@78.725,55.275 ; U112.1@76.275,60.275 76.575,60.275 78.275,61.975 pad.*@78.725,61.975 ; U92.1@76.275,66.975 76.575,66.975 78.275,68.675 pad.*@78.725,68.675 ; U72.1@76.275,73.675 76.575,73.675 78.275,75.375 pad.*@78.725,75.375 ; U52.1@76.275,80.375 76.575,80.375 78.275,82.075 pad.*@78.725,82.075 ; U32.1@76.275,87.075 76.575,87.075 78.275,88.775 pad.*@78.725,88.775 ; U218.1@82.975,6.675 83.275,6.675 84.975,8.375 v1(85.425,8.375) ; U208.1@82.975,13.375 83.275,13.375 84.975,15.075 v1(85.425,15.075) ; U198.1@82.975,20.075 83.275,20.075 84.975,21.775 v1(85.425,21.775) ; U188.1@82.975,26.775 83.275,26.775 84.975,28.475 v1(85.425,28.475) ; U178.1@82.975,33.475 83.275,33.475 84.975,35.175 v1(85.425,35.175) ; U168.1@82.975,40.175 83.275,40.175 84.975,41.875 v1(85.425,41.875) ; U153.1@82.975,46.875 83.275,46.875 84.975,48.575 pad.*@85.425,48.575 ; U133.1@82.975,53.575 83.275,53.575 84.975,55.275 pad.*@85.425,55.275 ; U113.1@82.975,60.275 83.275,60.275 84.975,61.975 pad.*@85.425,61.975 ; U93.1@82.975,66.975 83.275,66.975 84.975,68.675 pad.*@85.425,68.675 ; U73.1@82.975,73.675 83.275,73.675 84.975,75.375 pad.*@85.425,75.375 ; U53.1@82.975,80.375 83.275,80.375 84.975,82.075 pad.*@85.425,82.075 ; U33.1@82.975,87.075 83.275,87.075 84.975,88.775 pad.*@85.425,88.775 ; U219.1@89.675,6.675 89.975,6.675 91.675,8.375 v1(92.125,8.375) ; U209.1@89.675,13.375 89.975,13.375 91.675,15.075 v1(92.125,15.075) ; U199.1@89.675,20.075 89.975,20.075 91.675,21.775 v1(92.125,21.775) ; U189.1@89.675,26.775 89.975,26.775 91.675,28.475 v1(92.125,28.475) ; U179.1@89.675,33.475 89.975,33.475 91.675,35.175 v1(92.125,35.175) ; U169.1@89.675,40.175 89.975,40.175 91.675,41.875 v1(92.125,41.875) ; U154.1@89.675,46.875 89.975,46.875 91.675,48.575 pad.*@92.125,48.575 ; U134.1@89.675,53.575 89.975,53.575 91.675,55.275 pad.*@92.125,55.275 ; U114.1@89.675,60.275 89.975,60.275 91.675,61.975 pad.*@92.125,61.975 ; U94.1@89.675,66.975 89.975,66.975 91.675,68.675 pad.*@92.125,68.675 ; U74.1@89.675,73.675 89.975,73.675 91.675,75.375 pad.*@92.125,75.375 ; U54.1@89.675,80.375 89.975,80.375 91.675,82.075 pad.*@92.125,82.075 ; U34.1@89.675,87.075 89.975,87.075 91.675,88.775 pad.*@92.125,88.775 ; U220.1@96.375,6.675 96.675,6.675 98.375,8.375 v1(98.825,8.375) ; U210.1@96.375,13.375 96.675,13.375 98.375,15.075 v1(98.825,15.075) ; U200.1@96.375,20.075 96.675,20.075 98.375,21.775 v1(98.825,21.775) ; U190.1@96.375,26.775 96.675,26.775 98.375,28.475 v1(98.825,28.475) ; U180.1@96.375,33.475 96.675,33.475 98.375,35.175 v1(98.825,35.175) ; U170.1@96.375,40.175 96.675,40.175 98.375,41.875 v1(98.825,41.875) ; U155.1@96.375,46.875 96.675,46.875 98.375,48.575 pad.*@98.825,48.575 ; U135.1@96.375,53.575 96.675,53.575 98.375,55.275 pad.*@98.825,55.275 ; U115.1@96.375,60.275 96.675,60.275 98.375,61.975 pad.*@98.825,61.975 ; U95.1@96.375,66.975 96.675,66.975 98.375,68.675 pad.*@98.825,68.675 ; U75.1@96.375,73.675 96.675,73.675 98.375,75.375 pad.*@98.825,75.375 ; U55.1@96.375,80.375 96.675,80.375 98.375,82.075 pad.*@98.825,82.075 ; U35.1@96.375,87.075 96.675,87.075 98.375,88.775 pad.*@98.825,88.775 ; U156.1@103.075,46.875 103.375,46.875 105.075,48.575 pad.*@105.525,48.575 ; U136.1@103.075,53.575 103.375,53.575 105.075,55.275 pad.*@105.525,55.275 ; U116.1@103.075,60.275 103.375,60.275 105.075,61.975 pad.*@105.525,61.975 ; U96.1@103.075,66.975 103.375,66.975 105.075,68.675 pad.*@105.525,68.675 ; U76.1@103.075,73.675 103.375,73.675 105.075,75.375 pad.*@105.525,75.375 ; U56.1@103.075,80.375 103.375,80.375 105.075,82.075 pad.*@105.525,82.075 ; U36.1@103.075,87.075 103.375,87.075 105.075,88.775 pad.*@105.525,88.775 ; C1.1@107.749,23.248 C1.1@107.76,23.237 ; U157.1@109.775,46.875 110.075,46.875 111.775,48.575 pad.*@112.225,48.575 ; U137.1@109.775,53.575 110.075,53.575 111.775,55.275 pad.*@112.225,55.275 ; U117.1@109.775,60.275 110.075,60.275 111.775,61.975 pad.*@112.225,61.975 ; U97.1@109.775,66.975 110.075,66.975 111.775,68.675 pad.*@112.225,68.675 ; U77.1@109.775,73.675 110.075,73.675 111.775,75.375 pad.*@112.225,75.375 ; U57.1@109.775,80.375 110.075,80.375 111.775,82.075 pad.*@112.225,82.075 ; U37.1@109.775,87.075 110.075,87.075 111.775,88.775 pad.*@112.225,88.775 ; U158.1@116.475,46.875 116.775,46.875 118.475,48.575 pad.*@118.925,48.575 ; U138.1@116.475,53.575 116.775,53.575 118.475,55.275 pad.*@118.925,55.275 ; U118.1@116.475,60.275 116.775,60.275 118.475,61.975 pad.*@118.925,61.975 ; U98.1@116.475,66.975 116.775,66.975 118.475,68.675 pad.*@118.925,68.675 ; U78.1@116.475,73.675 116.775,73.675 118.475,75.375 pad.*@118.925,75.375 ; U58.1@116.475,80.375 116.775,80.375 118.475,82.075 pad.*@118.925,82.075 ; U38.1@116.475,87.075 116.775,87.075 118.475,88.775 pad.*@118.925,88.775 ; U159.1@123.175,46.875 123.475,46.875 125.175,48.575 v1(125.625,48.575) ; U139.1@123.175,53.575 123.475,53.575 125.175,55.275 v1(125.625,55.275) ; U119.1@123.175,60.275 123.475,60.275 125.175,61.975 v1(125.625,61.975) ; U99.1@123.175,66.975 123.475,66.975 125.175,68.675 v1(125.625,68.675) ; U79.1@123.175,73.675 123.475,73.675 125.175,75.375 v1(125.625,75.375) ; U59.1@123.175,80.375 123.475,80.375 125.175,82.075 v1(125.625,82.075) ; U39.1@123.175,87.075 123.475,87.075 125.175,88.775 v1(125.625,88.775) ; U160.1@129.875,46.875 130.175,46.875 131.875,48.575 v2(132.325,48.575) ; U140.1@129.875,53.575 130.175,53.575 131.875,55.275 v1(132.325,55.275) ; U120.1@129.875,60.275 130.175,60.275 131.875,61.975 v1(132.325,61.975) ; U100.1@129.875,66.975 130.175,66.975 131.875,68.675 v1(132.325,68.675) ; U80.1@129.875,73.675 130.175,73.675 131.875,75.375 v1(132.325,75.375) ; U60.1@129.875,80.375 130.175,80.375 131.875,82.075 v1(132.325,82.075) ; U40.1@129.875,87.075 130.175,87.075 131.875,88.775 v1(132.325,88.775)
  Top Layer w0.381: v2(107.2,16.75) 107.2,16.917 107.675,17.392 U221.3@107.675,18.313 ; C1.1@107.749,23.248 107.749,23.197 105.608,21.056 104.806,21.056 v2(104.687,20.937) 104.829,20.937 105.44,20.326 U221.1@107.76,20.326
  Top Layer w0.5: v2(113.9,32.663) 114.375,32.663 Q2.2@115.937,31.1 ; v2(114.737,34.338) 114.737,33.796 115.259,33.275 Q1.2@116.413,33.275 ; Q3.2@117.975,30.512 118.031,30.569 118.031,31.769 v2(118.088,31.825)
  other v1: 65.325,8.375 65.325,15.075 65.325,21.775 65.325,28.475 65.325,41.875
pads on no net: P2.6 P2.7 P2.8 P2.9 U40.2 U80.2 U120.2 U160.2 U220.2 U221.4 U222.1 U222.2 U222.3 U222.4 U222.5 U222.6 U222.9 U222.10 U222.11 U222.12 U222.13 U222.14 U222.15 U222.16 U222.18 U222.19 U222.20 U222.23 U222.24 U222.26 U222.27 U222.28 U222.30 U222.31 U222.32 U222.36 U222.44 U222.45 U222.46 U222.49 U222.50 U222.51 U222.53 U222.59 U222.60 U222.61 U222.62 U222.63 U222.64

## Polygon pours and split planes (outlines as drawn)
GND on Top Layer "5V_L02_P-001" (solid, pour order 0): 0,96.312 0,41.875 35.175,41.875 35.175,0 102.175,0 102.175,41.875 135.675,41.875 135.675,96.312
GND on Top Layer "5V_L02_P-001" (solid, remove dead copper, pour order 1): 14.238,40.2 33.5,40.2 33.5,20.1 14.238,20.1
GND on Int1 (GND) "5V_L02_P-001" (solid, pour order 2): 0,35.175 35.175,0 101.338,0 136.513,35.175 136.513,96.312 0,96.312
VCC on Int2 (PWR) "5V_L02_P-001" (solid, pour order 3): 0,96.312 0,35.175 35.175,0 101.338,0 136.513,35.175 136.513,96.312

## Silkscreen, mask and mechanical layers (free items; w line width, h text height)
Top Overlay:
  text "0" at 0.242,91.118 h1.52
  text "1" at 0.471,77.928 h1.52
  text "2" at 0.421,64.362 h1.52
  text "3" at 0.305,50.937 h1.52
  text "4" at 33.5,40.2 h1.52
  text "+ -" at 115.829,20.354 h1.52
Bottom Overlay:
  lines w0.254: 28.307,11.372 28.321,11.357 28.321,10.717 28.325,10.713 30.319,10.713 30.327,10.721 30.327,11.372 30.234,11.372
  text "NRF24L01+" at 109.459,42.967 h1.52
  text "WS2812B-B" at 134.838,40.2 h1.52
  text "+3.7V" at 116.968,32.408 h1.52 r90
  text "GND" at 119.509,29.896 h1.52 r90
  text "GND" at 103.596,29.566 h1.52
  text "ATSAMC21J18A-AUT" at 34.338,25.963 h1.52
  text "Atmel-ICE / SAM" at 34.338,15.075 h1.52
  text "Design: Connor Monahan - 2020" at 100.5,2.512 h1.52
Mechanical 1:
  lines w0.254: 0,35.016 0,96.004 136.004,96.004 136.004,35.038 100.966,0 35.016,0 0,35.016

## Text inside footprints (layer, text, board x,y; h text height)
P2: Bottom Overlay "2" at 33.717,13.597 h1.02; Bottom Overlay "1" at 33.318,11.797 h1.02; Bottom Overlay "10" at 25.608,13.597 h1.02; Bottom Overlay "9" at 25.608,11.797 h1.02
P3: Bottom Overlay "2" at 107.53,29.285 h1.27 r270; Bottom Overlay "1" at 104.99,29.793 h1.27 r270; Bottom Overlay "7" at 104.99,40.969 h1.27 r270; Bottom Overlay "8" at 107.53,40.969 h1.27 r270